# EAGLE board acs712 (EAGLE 5.10)
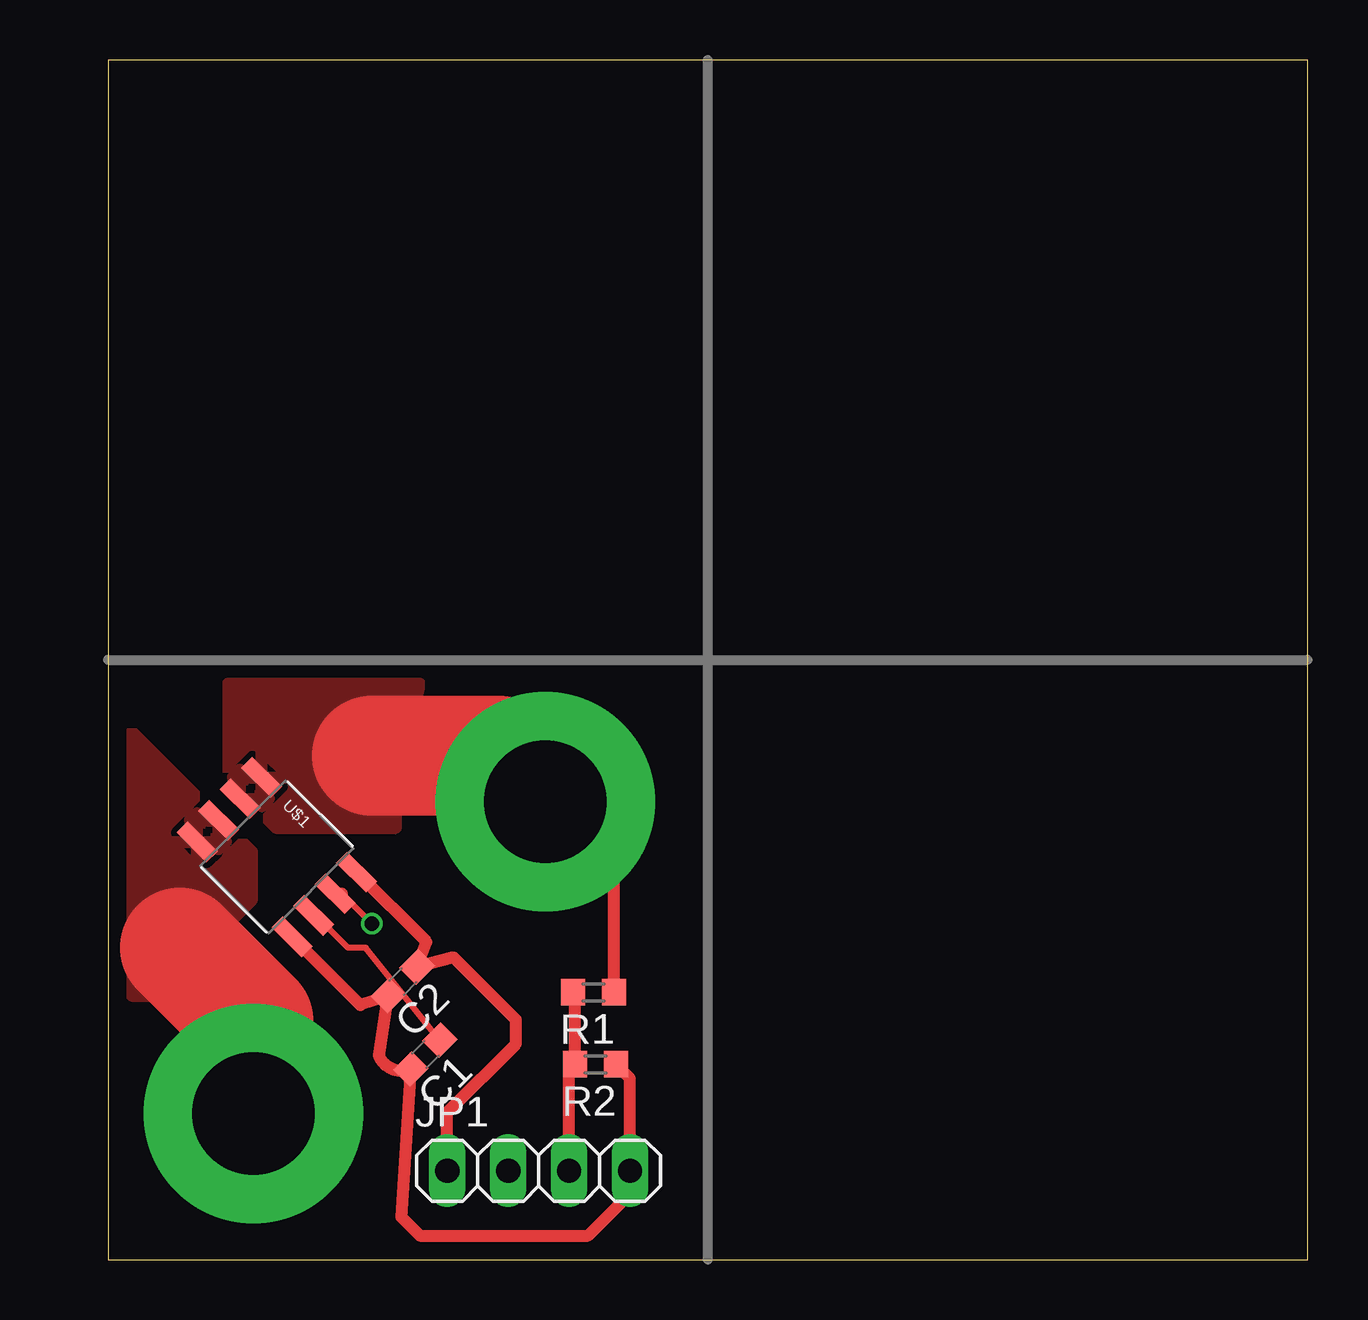
[diagram p0: board, top side]
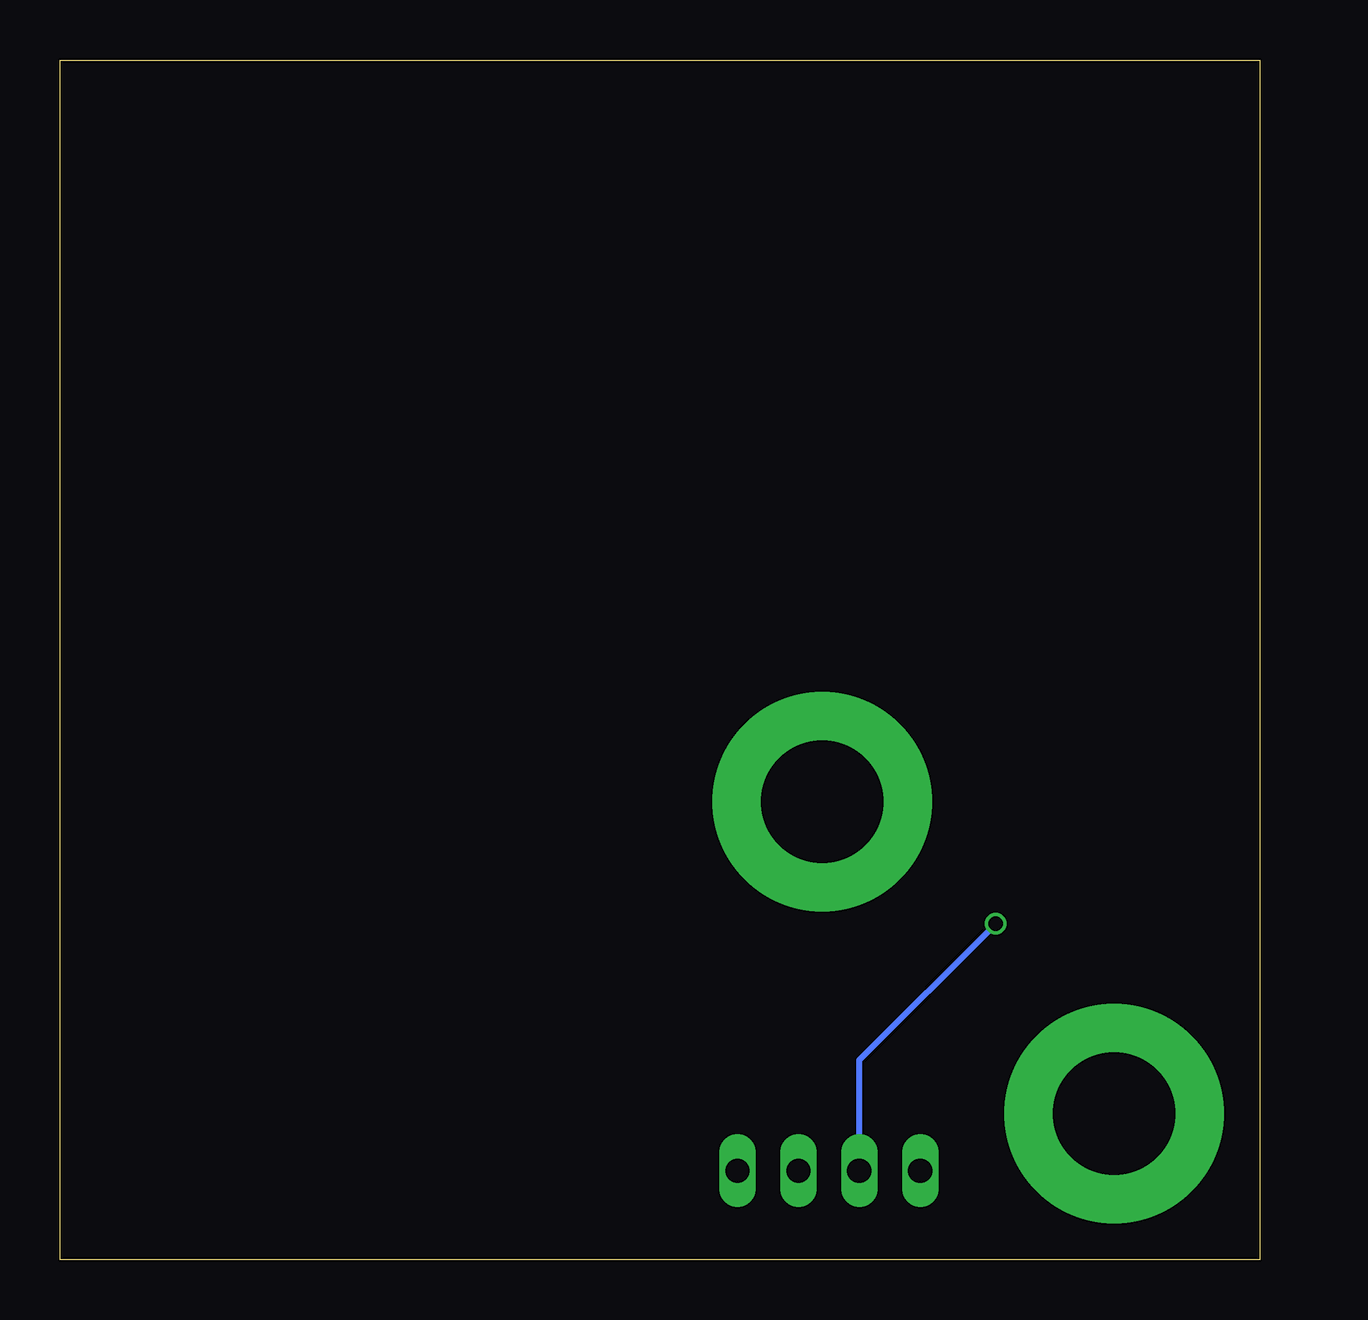
[diagram p1: board, bottom side, seen from below]

Size 50 x 50 mm. Coordinates in mm from the lower left corner, seen from the top.
Outline: 0,0 50,0 50,50 0,50 0,0
Copper layers (1*16): Top 0.035mm / dielectric 1.5mm / Bottom 0.035mm
Design rules "Fusion_eagle_rule_v1.1": minimum track width 6mil, minimum drill 12mil, track to track 6mil, track to pad 6mil, pad to pad 6mil, via to via 6mil, smd to smd 0mil, copper to edge 10mil, drill to drill 10mil, minimum pad ring 10mil, minimum via ring 6mil, stop-mask expansion 2mil, vias tented up to drill 100mil, thermal gap 10mil

## Footprints (pad centres in the part's own frame; a part is rotated, then mirrored left to right if it is on the bottom)
C0603 = smd 1.1 x 1: 1 -0.85,0; 2 0.85,0
1X04 = drill 1.016 long: 1 -3.81,0; 2 -1.27,0; 3 1.27,0; 4 3.81,0
R0603 = smd 1 x 1.1: 1 -0.85,0; 2 0.85,0
SOICC = smd 1.75 x 0.65: 1 -2.8,1.9; 2 -2.8,0.63; 3 -2.8,-0.64; 4 -2.8,-1.91; 5 2.8,-1.91; 6 2.8,-0.64; 7 2.8,0.63; 8 2.8,1.9
SCREW10 = drill 5.105 pad 9.144 round: 1 0,0

## Placement (x,y rotation side)
C1  [C0603]  13.23,8.54 225 top
C2  [C0603]  12.29,11.6 225 top
JP1  [1X04]  17.95,3.7 0 top
R1  [R0603]  20.24,11.14 180 top
R2  [R0603]  20.32,8.14 180 top
U$1  ACS712  [SOICC]  7.04,16.78 315 top
U$2  SCREW  [SCREW10]  18.22,19.08 0 top
U$3  SCREW  [SCREW10]  6.06,6.08 0 top

## Library data of the parts
C1 C2 R1 R2 = resistor
JP1 = pinhead
U$1-U$3 = lee

## Nets
GND: C1.2 C2.2 JP1.4 R2.1 U$1.5
IP+: R1.1 U$1.1 U$1.2 U$2.1
IP-: U$1.3 U$1.4 U$3.1
N$2: JP1.2 U$1.7
N$6: C1.1 U$1.6
N$7: JP1.3 R1.2 R2.2
VCC: C2.1 JP1.1 U$1.8

## Tracks (layer width: path | path; a pad name or v marks a point on that pad's centre or on a via)
GND
  Top 0.5: U$1.5 10.52,10.61 C2.2 11.3,8.49 arc90 C1.2 12.24,1.76 13,1 20,1 22,3 22,3.46 JP1.4 21.76,7.55 R2.1
IP+
  Top 0.5: R1.1 21.09,16.21 U$2.1
  Top 5: U$2.1 16.3,21 11,21
  pour Top: 13,24 5,24 5,20 7,18 12,18 12,20
IP-
  Top 5: U$3.1 6.06,9.94 3,13
  pour Top (isolate 0.254): 4,19 1,22 1,11 2,11 6,15 6,17
N$2  (via drill 0.6)
  Top 0.254: v11,14 9.75,15.25
  Top 0.5: 9.75,15.25 U$1.7
  Bottom 0.254: v11,14 16.68,8.32 JP1.2
N$6
  Top 0.254: 8.65,14.35 10,13 10.75,13 C1.1
  Top 0.5: 8.65,14.35 U$1.6
N$7
  Top 0.5: JP1.3 19.22,7.89 arc-90 R2.2 19.47,11.06 arc90 R1.2
VCC
  Top 0.5: U$1.8 13.28,13.24 C2.1 14.41,12.59 17,10 17,9 14.14,6.14 JP1.1